# EAGLE board daughter 2 routed (EAGLE 9.6.2)
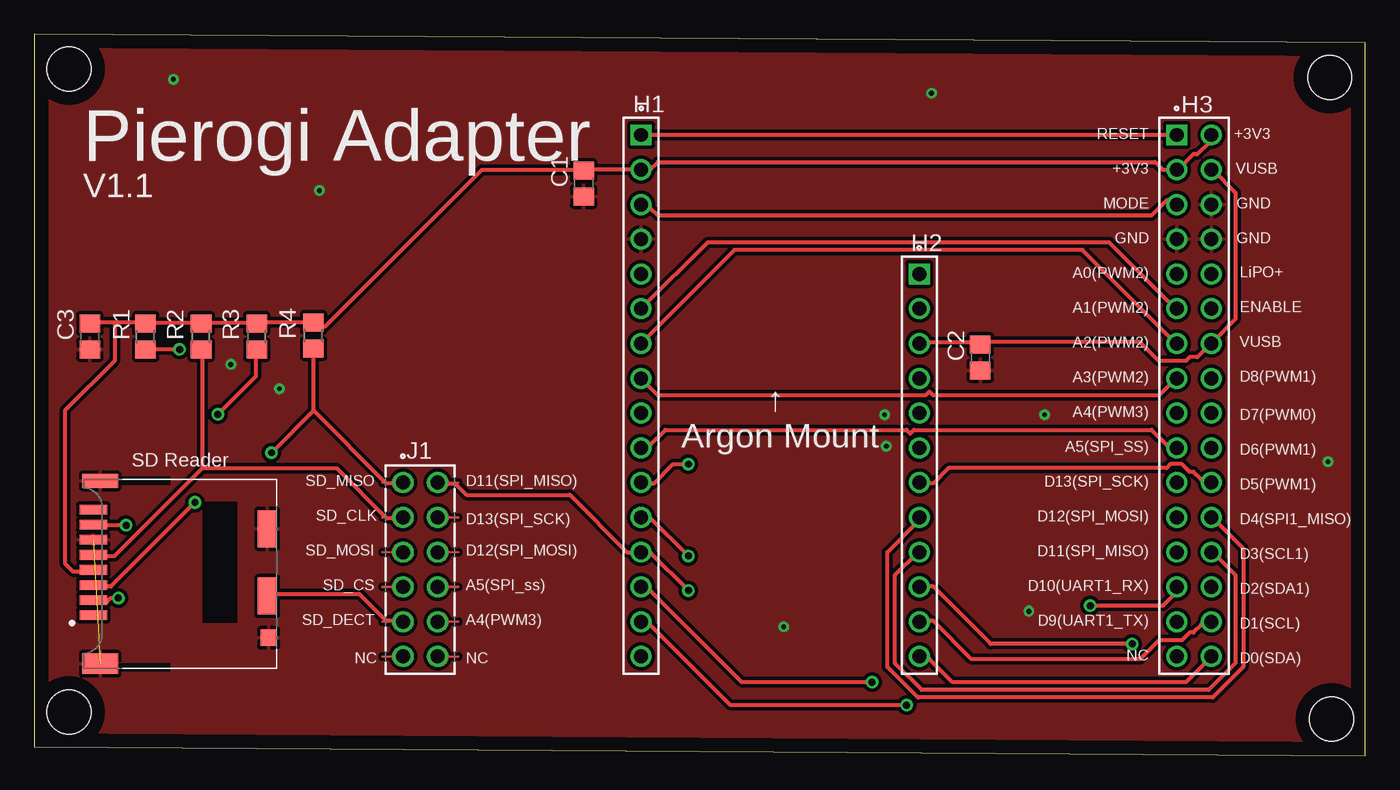
[diagram p0: board, top side]
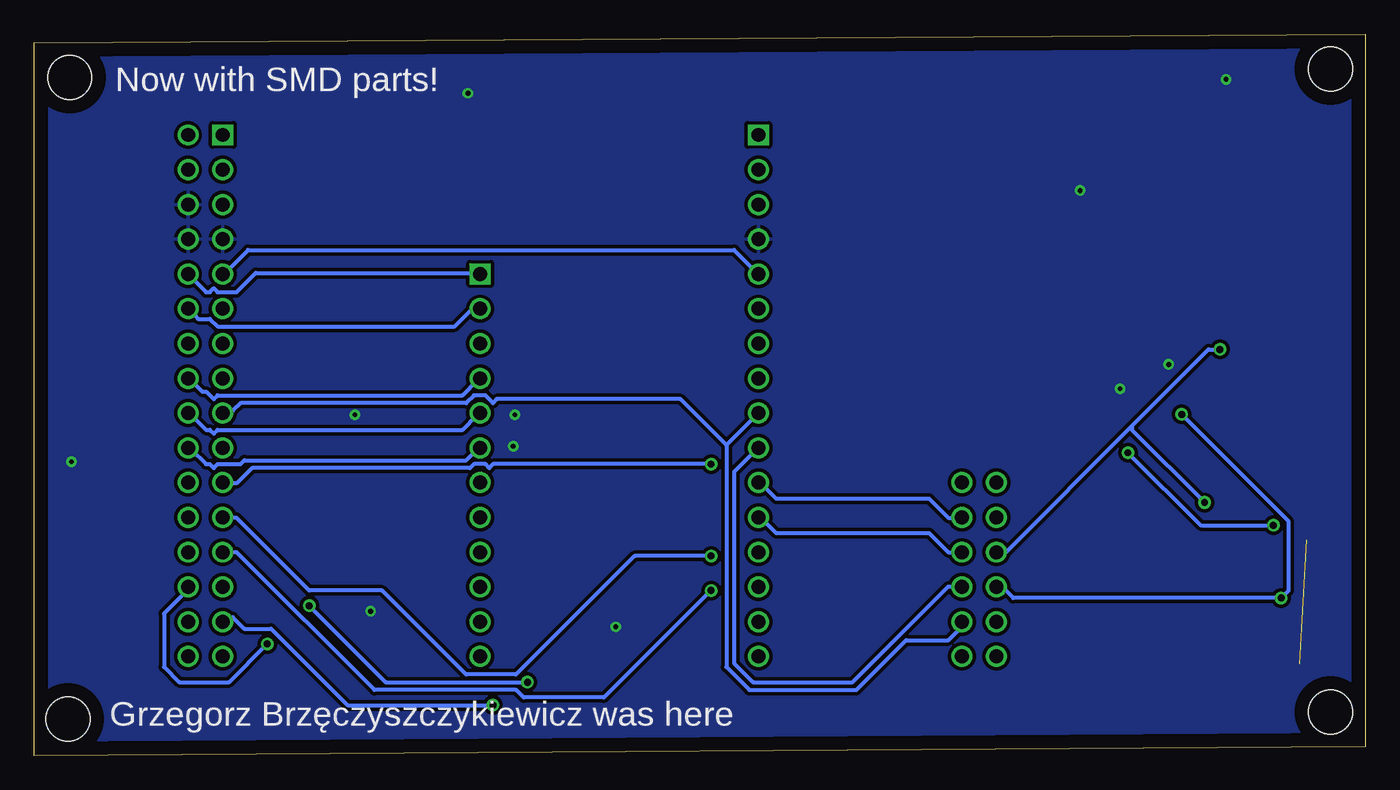
[diagram p1: board, bottom side, seen from below]

Size 97.21 x 52.7 mm. Coordinates in mm from the lower left corner, seen from the top.
Outline: 0,0.64 97.21,0 97.21,52.06 0,52.7 0,0.64
Copper layers (1*16): Top 0.035mm / dielectric 1.5mm / Bottom 0.035mm
Design rules "default": minimum track width 6mil, minimum drill 0.35mm, track to track 6mil, track to pad 6mil, pad to pad 6mil, via to via 6mil, smd to smd 6mil, copper to edge 40mil, drill to drill 6mil, minimum pad ring 10mil, minimum via ring 8mil, stop-mask expansion 4mil, vias tented up to drill 0mil, thermal gap 10mil
Net classes: 0 default: width 0.305 mm, drill 0.508 mm, clearance 0.254 mm
Holes 3.2 mm at 2.54,50.17 94.61,49.53 2.54,3.18 94.74,2.67

## Footprints (pad centres in the part's own frame; a part is rotated, then mirrored left to right if it is on the bottom)
C0805 = smd 1.3 x 1.5: 1 -0.95,0; 2 0.95,0
SAMTEC_DW-16-09-T-S-437-LL = drill 1.02 pad 1.37 square: 01 0,0 | drill 1.02 pad 1.37: 02 2.54,0; 03 5.08,0; 04 7.62,0; 05 10.16,0; 06 12.7,0; 07 15.24,0; 08 17.78,0; 09 20.32,0; 10 22.86,0; 11 25.4,0; 12 27.94,0; 13 30.48,0; 14 33.02,0; 15 35.56,0; 16 38.1,0
SAMTEC_DW-12-13-T-S-827 = drill 1.02 pad 1.37 square: 01 0,0 | drill 1.02 pad 1.37: 02 2.54,0; 03 5.08,0; 04 7.62,0; 05 10.16,0; 06 12.7,0; 07 15.24,0; 08 17.78,0; 09 20.32,0; 10 22.86,0; 11 25.4,0; 12 27.94,0
SAMTEC_ZW-16-07-T-D-200-100 = drill 1.02 pad 1.37 square: 01 0,0 | drill 1.02 pad 1.37: 02 0,2.54; 03 2.54,0; 04 2.54,2.54; 05 5.08,0; 06 5.08,2.54; 07 7.62,0; 08 7.62,2.54; 09 10.16,0; 10 10.16,2.54; 11 12.7,0; 12 12.7,2.54; 13 15.24,0; 14 15.24,2.54; 15 17.78,0; 16 17.78,2.54; 17 20.32,0; 18 20.32,2.54; 19 22.86,0; 20 22.86,2.54; 21 25.4,0; 22 25.4,2.54; 23 27.94,0; 24 27.94,2.54; 25 30.48,0; 26 30.48,2.54; 27 33.02,0; 28 33.02,2.54; 29 35.56,0; 30 35.56,2.54; 31 38.1,0; 32 38.1,2.54
SAMTEC_MTLW-106-22-G-D-380 = drill 1.02 pad 1.52: 01 -6.35,-1.27; 02 -6.35,1.27; 03 -3.81,-1.27; 04 -3.81,1.27; 05 -1.27,-1.27; 06 -1.27,1.27; 07 1.27,-1.27; 08 1.27,1.27; 09 3.81,-1.27; 10 3.81,1.27; 11 6.35,-1.27; 12 6.35,1.27
R0805 = smd 1.3 x 1.5: 1 -0.95,0; 2 0.95,0
HRS_DM3CS-SF = smd 0.7 x 2: 1 3.2,-6.35; 2 2.1,-6.35; 3 1,-6.35; 4 -0.1,-6.35; 5 -1.2,-6.35; 6 -2.3,-6.35; 7 -3.4,-6.35; 8 -4.5,-6.35 | smd 2.7 x 1.4: 9 1.8,6.35; S3 -3.1,6.35 | smd 1 x 2.6: S1 -6.6,-5.85 | smd 1.5 x 2.6: S2 6.75,-5.85 | smd 1.2 x 1.2: S5 4.85,6.45

## Placement (x,y rotation side)
C1  .1uF  [C0805]  40.13,41.78 270 top
C2  .1uF  [C0805]  69.09,29.08 270 top
C3  .1uF  [C0805]  4.06,30.61 270 top
H1  DW-16-09-T-S-437-LL  [SAMTEC_DW-16-09-T-S-437-LL]  44.32,45.34 270 top
H2  DW-12-13-T-S-827  [SAMTEC_DW-12-13-T-S-827]  64.64,35.18 270 top
H3  ZW-16-07-T-D-200-100  [SAMTEC_ZW-16-07-T-D-200-100]  83.44,45.34 270 top
J1  MTLW-106-22-G-D-380  [SAMTEC_MTLW-106-22-G-D-380]  28.19,13.59 270 top
R1  10K  [R0805]  8.13,30.61 90 top
R2  10K  [R0805]  12.19,30.61 90 top
R3  10K  [R0805]  16.26,30.61 90 top
R4  10K  [R0805]  20.4,30.68 90 top
SD1  DM3CS-SF  [HRS_DM3CS-SF]  10.67,13.46 270 top

## Library data of the parts
C1-C3 = rcl; SPICEPREFIX: C
H1 = DW-16-09-T-S-437-LL; AVAILABILITY: In Stock; DESCRIPTION: 16 Position Header Spacer Connector 0.100 (2.54mm) Tin Through Hole; MF: Samtec; MP: DW-16-09-T-S-437-LL; PACKAGE: None; PRICE: None; PURCHASE-URL: https://pricing.snapeda.com/search/part/DW-16-09-T-S-437-LL/?ref=eda
H2 = DW-12-13-T-S-827; AVAILABILITY: In Stock; DESCRIPTION: 12 Position Header Spacer Connector 0.100 (2.54mm) Tin Through Hole; MF: Samtec Inc.; MP: DW-12-13-T-S-827; PACKAGE: None; PRICE: None; PURCHASE-URL: https://pricing.snapeda.com/search/part/DW-12-13-T-S-827/?ref=eda
H3 = ZW-16-07-T-D-200-100; AVAILABILITY: In Stock; DESCRIPTION: 32 Position Header Spacer Connector 0.100 (2.54mm) Tin Through Hole; MF: Samtec Inc.; MP: ZW-16-07-T-D-200-100; PACKAGE: None; PRICE: None; PURCHASE-URL: https://pricing.snapeda.com/search/part/ZW-16-07-T-D-200-100/?ref=eda
J1 = MTLW-106-22-G-D-380; AVAILABILITY: In Stock; DESCRIPTION: CONN HEADER VERT 12POS 2.54MM; MF: Samtec; MP: MTLW-106-22-G-D-380; PACKAGE: None; PRICE: None; PURCHASE-URL: https://pricing.snapeda.com/search/part/MTLW-106-22-G-D-380/?ref=eda
R1-R4 = rcl; SPICEPREFIX: R
SD1 = DM3CS-SF; AVAILABILITY: In Stock; DESCRIPTION: 10 (8 + 2) Position Card Connector Secure Digital - microSD™ Surface Mount, Right Angle Gold; MF: Hirose; MP: DM3CS-SF; PACKAGE: None; PRICE: None; PURCHASE-URL: https://pricing.snapeda.com/search/part/DM3CS-SF/?ref=eda

## Nets
+3V3: C1.1 C3.1 H1.02 H3.02 H3.03 R1.2 R2.2 R3.2 R4.2 SD1.4
A0(PWM2): H1.05 H3.09
A1(PWM2): H1.06 H3.11
A2(PWM2): H1.07 H3.13
A3(PWM2): H1.08 H3.15
A4(PWM3): H1.09 H3.17 J1.10
A5(SPI_SS): H1.10 H3.19 J1.08
D0(SDA): H2.12 H3.32
D1(SCL): H2.11 H3.30
D2(SDA1): H2.10 H3.28
D3(SCL1): H2.09 H3.26
D4(SPI1_MISO): H2.08 H3.24
D5(PWM1): H2.07 H3.22
D6(PWM1): H2.06 H3.20
D7(PWM0): H2.05 H3.18
D8(PWM1): H2.04 H3.16
D9(UART1_TX): H1.15 H3.29
D10(UART1_RX): H1.14 H3.27
D11(SPI_MISO): H1.13 H3.25 J1.02
D12(SPI_MOSI): H1.12 H3.23 J1.06
D13(SPI_SCK): H1.11 H3.21 J1.04
ENABLE: H2.02 H3.12
GND: C1.2 C2.2 C3.2 H1.04 H3.06 H3.07 H3.08 SD1.6 SD1.S1 SD1.S2 SD1.S3 SD1.S5
LIPO+: H2.01 H3.10
MODE: H1.03 H3.05
RESET: H1.01 H3.01
SD_CLK: J1.03 R2.1 SD1.5
SD_CS: J1.07 R3.1 SD1.2
SD_DECT: J1.09 SD1.9
SD_MISO: J1.01 R4.1 SD1.7
SD_MOSI: J1.05 R1.1 SD1.3
VBUS: C2.1 H2.03 H3.04 H3.14

## Tracks (layer width: path | path; a pad name or v marks a point on that pad's centre or on a via)
+3V3
  Top 0.305: H3.02 85.78,45.31 85.78,44.75 84.94,43.92 84.66,43.92 83.54,42.8 H3.03 82.42,42.8 81.86,43.36 45.54,43.36 44.98,42.8 H1.02 40.23,42.8 C1.1 39.95,42.8 32.69,42.8 21.23,31.34 20.68,31.34 20.4,31.62 | 20.4,31.62 16.48,31.62 R3.2 16.2,31.62 12.29,31.62 R2.2 12.01,31.62 8.38,31.62 R1.2 8.1,31.62 5.87,31.62 | 5.87,31.62 4.19,31.62 C3.1 | 5.87,31.62 5.87,28.83 2.23,25.2 2.23,14.02 2.79,13.46 4.19,13.46 SD1.4 | 20.4,31.62 R4.2
A0(PWM2)
  Bottom 0.305: H1.05 44.42,35.25 46.1,36.93 81.58,36.93 83.26,35.25 H3.09
A1(PWM2)
  Top 0.305: H1.06 49.17,37.49 78.51,37.49 83.26,32.74 H3.11
A2(PWM2)
  Top 0.305: H1.07 44.42,30.23 51.13,36.93 76.56,36.93 83.26,30.23 H3.13
A3(PWM2)
  Top 0.305: H1.08 44.42,27.43 45.54,26.31 65.1,26.31 65.38,26.59 65.66,26.31 82.14,26.31 83.26,27.43 H3.15
A4(PWM3)
  Bottom 0.305: 46.66,22.68 46.66,6.48 44.98,4.8 37.16,4.8 33.53,8.43 30.45,8.43 29.62,9.27 29.62,9.55 J1.10 | H1.09 46.66,22.68 | 46.66,22.68 50.01,26.04 63.42,26.04 63.7,25.76 64.26,26.31 65.1,26.31 65.66,25.76 82.14,25.76 82.7,25.2 83.26,25.2 H3.17
A5(SPI_SS)
  Top 0.305: H3.19 83.26,22.68 82.7,22.68 81.58,23.8 64.26,23.8 63.98,23.52 63.7,23.8 46.1,23.8 44.98,22.68 44.42,22.68 H1.10
  Bottom 0.305: J1.08 29.62,12.34 30.45,12.34 37.44,5.36 44.7,5.36 46.1,6.76 46.1,20.73 44.42,22.4 H1.10
D0(SDA)
  Top 0.305: H2.12 64.82,7.04 65.38,7.04 67.06,5.36 84.1,5.36 85.5,6.76 85.5,7.04 85.78,7.31 H3.32
D1(SCL)
  Top 0.305: H2.11 64.82,9.83 65.66,9.83 68.45,7.04 80.75,7.04 82.14,8.43 83.82,8.43 84.38,8.99 84.66,8.99 85.22,9.55 85.78,9.55 H3.30
D2(SDA1)  (via drill 0.51)
  Top 0.305: v80.19,8.15 69.85,8.15 65.66,12.34 64.82,12.34 H2.10
  Bottom 0.305: v80.19,8.15 82.98,5.36 86.61,5.36 87.73,6.48 87.73,10.39 86.33,11.79 86.06,11.79 85.78,12.06 H3.28
D3(SCL1)
  Top 0.305: H2.09 64.54,14.86 62.87,13.18 62.87,6.76 64.82,4.8 85.78,4.8 87.73,6.76 87.73,13.18 86.06,14.86 H3.26
D4(SPI1_MISO)
  Top 0.305: H2.08 64.54,17.37 64.54,17.09 62.31,14.86 62.31,6.48 64.54,4.24 86.06,4.24 88.29,6.48 88.29,15.14 86.06,17.37 H3.24
D5(PWM1)
  Top 0.305: H2.07 64.82,19.89 65.66,19.89 66.78,21.01 82.7,21.01 82.98,21.29 83.82,21.29 84.38,20.73 84.66,20.73 85.22,20.17 85.78,20.17 H3.22
D6(PWM1)
  Bottom 0.305: H2.06 64.82,22.4 65.66,21.56 81.86,21.56 82.14,21.29 83.82,21.29 84.1,21.01 84.38,21.29 84.66,21.29 85.78,22.4 H3.20
D7(PWM0)
  Bottom 0.305: H2.05 64.82,24.92 65.94,23.8 83.82,23.8 84.1,23.52 84.38,23.8 84.66,23.8 85.78,24.92 H3.18
D8(PWM1)
  Bottom 0.305: H2.04 64.82,27.43 65.94,26.31 83.82,26.31 84.1,26.04 84.66,26.59 84.94,26.59 85.5,27.15 85.5,27.43 85.78,27.71 H3.16
D9(UART1_TX)  (via drill 0.51)
  Top 0.305: v63.7,3.68 50.85,3.68 44.98,9.55 44.42,9.55 H1.15
  Bottom 0.305: v63.7,3.68 74.32,3.68 79.91,9.27 81.86,9.27 82.7,10.11 82.98,10.11 83.26,9.83 H3.29
D10(UART1_RX)  (via drill 0.51)
  Top 0.305: v61.19,5.36 51.69,5.36 44.98,12.06 44.42,12.06 H1.14 | v77.11,10.95 82.42,10.95 83.54,12.06 H3.27
  Bottom 0.305: v61.19,5.36 71.53,5.36 v77.11,10.95
D11(SPI_MISO)  (via drill 0.51)
  Top 0.305: J1.02 29.62,19.89 30.73,19.89 31.57,19.05 39.12,19.05 43.31,14.86 H1.13 44.98,14.86 v47.78,12.06
  Bottom 0.305: H3.25 82.42,14.86 72.36,4.8 62.03,4.8 61.47,4.24 55.6,4.24 v47.78,12.06
D12(SPI_MOSI)  (via drill 0.51)
  Top 0.305: v47.78,14.58 44.98,17.37 44.42,17.37 H1.12
  Bottom 0.305: J1.06 30.45,14.86 31.85,16.26 43.03,16.26 44.15,17.37 H1.12 | v47.78,14.58 53.37,14.58 62.03,5.92 65.66,5.92 71.81,12.06 77.11,12.06 82.42,17.37 83.26,17.37 H3.23
D13(SPI_SCK)  (via drill 0.51)
  Top 0.305: v47.78,21.29 46.66,21.29 45.26,19.89 44.42,19.89 H1.11
  Bottom 0.305: J1.04 29.62,17.37 30.45,17.37 31.85,18.77 43.03,18.77 44.15,19.89 H1.11 | v47.78,21.29 63.7,21.29 63.98,21.01 64.26,21.29 65.1,21.29 65.38,21.01 81.31,21.01 82.42,19.89 83.26,19.89 H3.21
ENABLE
  Bottom 0.305: H2.02 64.82,32.46 65.38,32.46 66.5,31.34 83.82,31.34 84.38,31.9 85.22,31.9 85.5,32.18 85.5,32.46 85.78,32.74 H3.12
GND  (via drill 0.35)  (1 unrouted)
  other vias: 10.16,49.4 20.83,41.28 65.53,48.39 94.49,21.46 17.91,26.8 14.35,28.58 54.74,9.4 62.23,22.61 62.1,24.89 72.64,10.54 73.79,24.89
  pour Top: -1.27,53.97 100.08,53.97 100.08,-0.63 -1.27,-0.63
  pour Bottom: -2.54,55.25 101.85,55.25 101.85,-1.9 -2.54,-1.9
LIPO+
  Bottom 0.305: H2.01 64.82,35.25 81.03,35.25 82.42,33.86 83.82,33.86 84.1,34.14 84.38,33.86 84.66,33.86 85.5,34.7 85.5,34.98 85.78,35.25 H3.10
MODE
  Top 0.305: H1.03 44.42,40 44.98,40 45.54,39.45 81.58,39.45 82.7,40.56 82.98,40.56 83.26,40.28 H3.05
RESET
  Top 0.305: H1.01 44.42,45.31 83.26,45.31 H3.01
SD_CLK
  Top 0.305: 12.29,21.01 12.29,29.39 R2.1 | 12.29,21.01 5.87,14.58 4.47,14.58 SD1.5 | 12.29,21.01 22.07,21.01 25.7,17.37 26.82,17.37 J1.03
SD_CS  (via drill 0.51)
  Top 0.305: v13.41,24.92 16.2,27.71 16.2,29.39 R3.1 | v6.15,11.51 5.59,11.51 5.31,11.23 4.47,11.23 SD1.2
  Bottom 0.305: v13.41,24.92 5.59,17.09 5.59,12.06 v6.15,11.51 25.7,11.51 26.26,12.06 26.82,12.06 J1.07
SD_DECT
  Top 0.305: SD1.9 17.04,11.79 23.75,11.79 25.7,9.83 26.82,9.83 J1.09
SD_MISO  (via drill 0.51)
  Top 0.305: 20.4,25.2 R4.1 | 20.4,25.2 25.7,19.89 26.82,19.89 J1.01 | v6.71,16.81 4.47,16.81 SD1.7 | 20.4,25.2 v17.32,22.12
  Bottom 0.305: v6.71,16.81 12.01,16.81 v17.32,22.12
SD_MOSI  (via drill 0.51)
  Top 0.305: v10.62,29.67 8.38,29.67 R1.1 | v11.73,18.49 5.59,12.34 4.47,12.34 SD1.3
  Bottom 0.305: v10.62,29.67 11.46,29.67 17.04,24.08 | 17.04,24.08 26.26,14.86 J1.05 | v11.73,18.49 17.04,23.8 17.04,24.08
VBUS
  Top 0.305: H2.03 64.82,30.23 69.01,30.23 C2.1 69.29,30.23 80.75,30.23 82.14,28.83 84.1,28.83 84.38,29.11 84.94,29.11 85.5,29.67 85.5,29.95 85.78,30.23 H3.14 86.06,30.23 87.73,31.9 87.73,41.12 86.06,42.8 H3.04

## Text on the board
tNames: RESET | +3V3 | +3V3 | VUSB | V1.1 | MODE | GND | Pierogi Adapter | GND | GND | A0(PWM2) | LiPO+ | A1(PWM2) | ENABLE | A2(PWM2) | VUSB | A3(PWM2) | D8(PWM1) | A4(PWM3) | D7(PWM0) | A5(SPI_SS) | ↑ / Argon Mount | D6(PWM1) | SD Reader | SD_MISO | D11(SPI_MISO) | D13(SPI_SCK) | D5(PWM1) | D12(SPI_MOSI) | SD_CLK | D13(SPI_SCK) | D4(SPI1_MISO) | D11(SPI_MISO) | SD_MOSI | D12(SPI_MOSI) | D3(SCL1) | D10(UART1_RX) | SD_CS | A5(SPI_ss) | D2(SDA1) | D9(UART1_TX) | SD_DECT | A4(PWM3) | D1(SCL) | NC | NC | NC | D0(SDA)
bNames: Now with SMD parts! | Grzegorz Brzęczyszczykiewicz was here